# EAGLE board CAPS- ELKO_TANTALUM_SMD (EAGLE 4.09)

Size 160 x 100 mm. Coordinates in mm from the lower left corner, seen from the top.
Outline: 0,0 160,0 160,100 0,100 0,0
Copper layers used: 

## Footprints (pad centres in the part's own frame; a part is rotated, then mirrored left to right if it is on the bottom)
E2-5 = drill 0.813 pad 1.27 round: + -1.016,0 | drill 0.813 pad 1.27 octagon: - 1.016,0
E2,5-5 = drill 0.813 pad 1.6 round: + -1.27,0 | drill 0.813 pad 1.6 octagon: - 1.27,0
E2,5-6 = drill 0.813 pad 1.6 round: + -1.27,0 | drill 0.813 pad 1.6 octagon: - 1.27,0
E3,5-8 = drill 0.813 pad 1.6 round: + -1.778,0 | drill 0.813 pad 1.6 octagon: - 1.778,0
E5-10,5 = drill 1.016 pad 2.54 round: + -2.54,0 | drill 1.016 pad 2.54 octagon: - 2.54,0
E5-13 = drill 1.016 pad 2.54 round: + -2.54,0 | drill 1.016 pad 2.54 octagon: - 2.54,0
E7,5-16 = drill 1.016 pad 3.15 round: + -3.81,0 | drill 1.016 pad 3.15 octagon: - 3.81,0
E7,5-18 = drill 1.016 pad 3.15 round: + -3.81,0 | drill 1.016 pad 3.15 octagon: - 3.81,0
TT2D4 = drill 0.813 round: + -1.27,0 | drill 0.813 octagon: - 1.27,0
TT2D5 = drill 0.813 round: + -1.27,0 | drill 0.813 octagon: - 1.27,0
TT2D6 = drill 0.813 round: + -1.27,0 | drill 0.813 octagon: - 1.27,0
TT2D7 = drill 0.813 round: + -1.27,0 | drill 0.813 octagon: - 1.27,0
TT5D6 = drill 0.813 round: + -2.54,0 | drill 0.813 octagon: - 2.54,0
TT5D7 = drill 0.813 round: + -2.54,0 | drill 0.813 octagon: - 2.54,0
TT5D9 = drill 0.813 round: + -2.54,0 | drill 0.813 octagon: - 2.54,0
TT5D10 = drill 0.813 round: + -2.54,0 | drill 0.813 octagon: - 2.54,0
TT5D11 = drill 0.813 round: + -2.54,0 | drill 0.813 octagon: - 2.54,0
C1825 = smd 1.9 x 6.8: 1 -1.95,0; 2 1.95,0
C1812 = smd 1.9 x 3.4: 1 -1.95,0; 2 1.95,0
C1210 = smd 1.6 x 2.7: 1 -1.4,0; 2 1.4,0
C1206 = smd 1.6 x 1.8: 1 -1.4,0; 2 1.4,0
C0805 = smd 1.3 x 1.5: 1 -0.85,0; 2 0.85,0
C0603 = smd 1.1 x 1: 1 -0.85,0; 2 0.85,0
C0402 = smd 0.7 x 0.9: 1 -0.65,0; 2 0.65,0
140CLH-0810 = smd 3.5 x 2.5: + 3.25,0; - -3.25,0
140CLH-1010 = smd 4.3 x 2.5: + 4.15,0; - -4.15,0
140CLH-1014 = smd 4.3 x 2.5: + 4.15,0; - -4.15,0
150CLZ-0810 = smd 3.5 x 2.5: + 3.25,0; - -3.25,0
150CLZ-1010 = smd 4.3 x 2.5: + 4.15,0; - -4.15,0
150CLZ-1014 = smd 4.3 x 2.5: + 4.15,0; - -4.15,0
153CLV-0405 = smd 2.6 x 1.6: + 1.8,0; - -1.8,0
153CLV-0505 = smd 3 x 1.6: + 2.2,0; - -2.2,0
153CLV-0605 = smd 3.5 x 1.6: + 2.7,0; - -2.7,0
153CLV-0807 = smd 4 x 1.6: + 3.05,0; - -3.05,0
153CLV-0810 = smd 3.5 x 2.5: + 3.25,0; - -3.25,0
153CLV-1010 = smd 4 x 2.5: + 4,0; - -4,0
153CLV-1012 = smd 4.3 x 2.5: + 4.15,0; - -4.15,0
153CLV-1014 = smd 4.3 x 2.5: + 4.15,0; - -4.15,0
175TMP-0808 = smd 3 x 2.5: + 3.5,0; - -3.5,0
175TMP-0810 = smd 3 x 2.5: + 3.5,0; - -3.5,0

## Placement (x,y rotation side)
E$1  E2-5  [E2-5]  9.52,88.1 0 top
E$2  E2,5-5  [E2,5-5]  26.03,88.1 0 top
E$3  E2,5-6  [E2,5-6]  43.81,88.1 0 top
E$4  E3,5-8  [E3,5-8]  62.86,88.1 0 top
E$5  E5-10,5  [E5-10,5]  81.91,88.1 0 top
E$6  E5-13  [E5-13]  100.96,88.1 0 top
E$7  E7,5-16  [E7,5-16]  121.28,88.1 0 top
E$8  E7,5-18  [E7,5-18]  145.41,88.1 0 top
E$9  TT2D4  [TT2D4]  12.06,63.97 0 top
E$10  TT2D5  [TT2D5]  24.76,63.97 0 top
E$11  TT2D6  [TT2D6]  41.27,63.97 0 top
E$12  TT2D7  [TT2D7]  59.05,63.97 0 top
E$13  TT5D6  [TT5D6]  74.29,63.97 0 top
E$14  TT5D7  [TT5D7]  88.26,63.97 0 top
E$15  TT5D9  [TT5D9]  104.77,63.97 0 top
E$16  TT5D10  [TT5D10]  122.55,63.97 0 top
E$17  TT5D11  [TT5D11]  145.41,63.97 0 top
E$18  C1825  [C1825]  14.6,48.73 0 top
E$19  C1812  [C1812]  26.03,48.73 0 top
E$20  C1210  [C1210]  36.19,48.73 0 top
E$21  C1206  [C1206]  46.35,48.73 0 top
E$22  C0805  [C0805]  53.97,48.73 0 top
E$23  C0603  [C0603]  64.13,48.73 0 top
E$24  C0402  [C0402]  71.75,48.73 0 top
E$25  140CLH-0810  [140CLH-0810]  12.06,29.68 0 top
E$26  140CLH-1010  [140CLH-1010]  31.11,29.68 0 top
E$27  140CLH-0814  [140CLH-1014]  48.89,29.68 0 top
E$28  150CLZ-0810  [150CLZ-0810]  64.13,29.68 0 top
E$29  150CLZ-01010  [150CLZ-1010]  79.37,29.68 0 top
E$30  150CLZ-0814  [150CLZ-1014]  95.88,29.68 0 top
E$31  153CLV-0405  [153CLV-0405]  109.85,29.68 0 top
E$32  153CLV-0505  [153CLV-0505]  120.01,29.68 0 top
E$33  153CLV-0605  [153CLV-0605]  131.44,29.68 0 top
E$34  153CLV-0807  [153CLV-0807]  145.41,29.68 0 top
E$35  153CLV-0810  [153CLV-0810]  12.06,10.63 0 top
E$36  153CLV-1010  [153CLV-1010]  31.11,10.63 0 top
E$37  153CLV-1012  [153CLV-1012]  48.89,10.63 0 top
E$38  153CLV-1014  [153CLV-1014]  64.13,10.63 0 top
E$39  175TMP-0808  [175TMP-0808]  79.37,10.63 0 top
E$40  175TMP-0810  [175TMP-0810]  95.88,10.63 0 top

## Library data of the parts
E$1-E$17 E$25-E$40 = rcl
E$18-E$24 = smd-ipc

## Text on the board
Top: ELECTROLYTIC | TANTALUM | SMD - DARKWOOD | SMD ELKO CASE - BCC COMPONENTS